# Allegro board PG-ADAPTER-1.brd
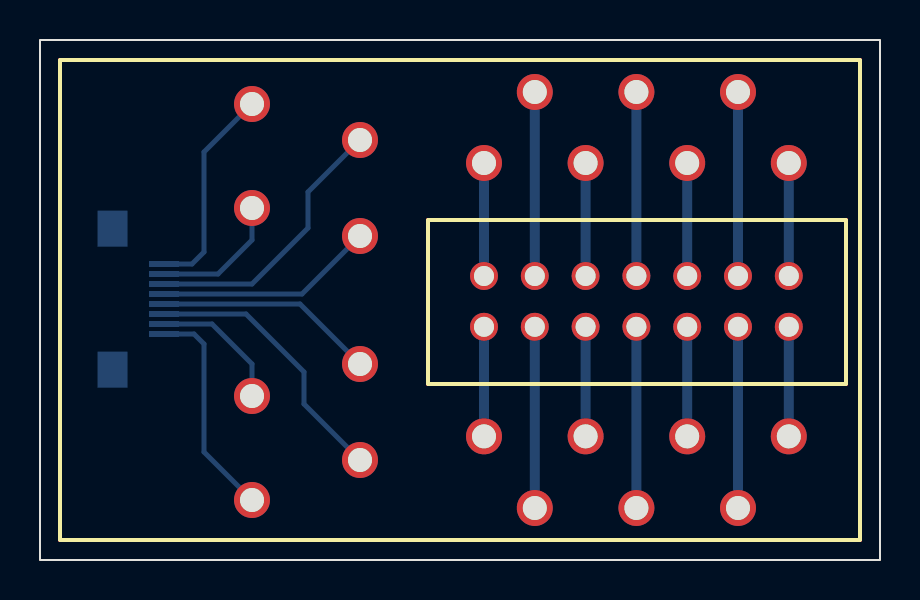
[diagram p0: board, top side]
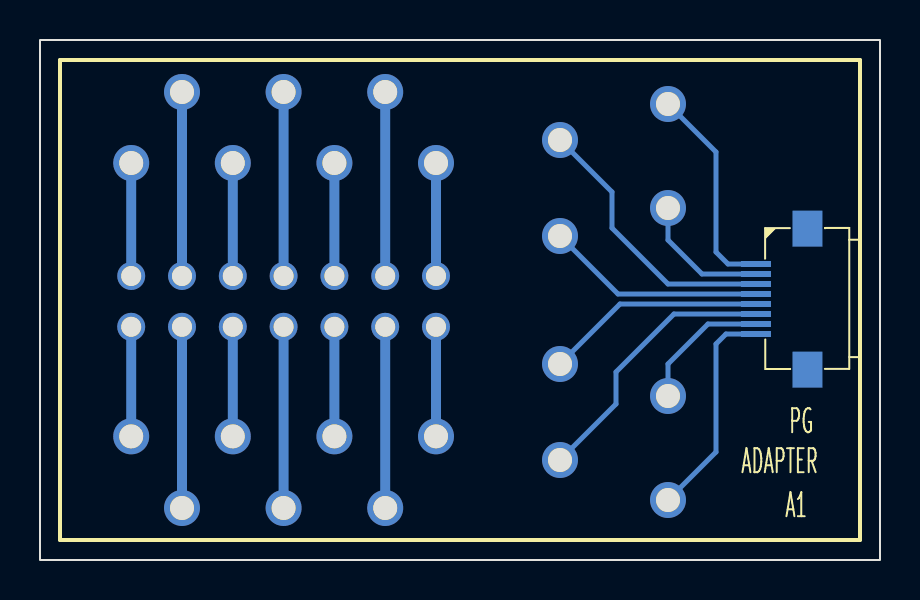
[diagram p1: board, bottom side, seen from below]

Outline 42 x 26 mm; copper layers: TOP, BOTTOM. Coordinates in mm from the lower left corner of the outline.
Outline path: rectangle 0,0 42,26

## Design rules (mm)
constraint set DEFAULT: min track width 0.127

## Placement (name value [footprint] x y rotation side)
J1  CONN-2x7  [CONN-THR-2X7-2D54]  22.2 14.2 0 top
J2  CONN-1X8  [FPC-0D5-8P]  6.2 14.8 270 bottom
NOREF  -  []  0 0 90 top
NOREF#2  -  []  0 26 0 top
TP1  T POINT R  [TP_THR_1D8_1D2]  10.6 22.8 270 bottom
TP2  T POINT R  [TP_THR_1D8_1D2]  10.6 17.6 270 bottom
TP3  T POINT R  [TP_THR_1D8_1D2]  16 21 270 bottom
TP4  T POINT R  [TP_THR_1D8_1D2]  16 16.2 270 bottom
TP5  T POINT R  [TP_THR_1D8_1D2]  16 9.8 270 bottom
TP6  T POINT R  [TP_THR_1D8_1D2]  16 5 270 bottom
TP7  T POINT R  [TP_THR_1D8_1D2]  10.6 8.2 270 bottom
TP8  T POINT R  [TP_THR_1D8_1D2]  10.6 3 270 bottom
TP9  T POINT R  [TP_THR_1D8_1D2]  37.44 19.85 180 bottom
TP10  T POINT R  [TP_THR_1D8_1D2]  34.9 23.4 180 bottom
TP11  T POINT R  [TP_THR_1D8_1D2]  32.36 19.85 180 bottom
TP12  T POINT R  [TP_THR_1D8_1D2]  29.82 23.4 180 bottom
TP13  T POINT R  [TP_THR_1D8_1D2]  27.28 19.85 180 bottom
TP14  T POINT R  [TP_THR_1D8_1D2]  24.74 23.4 180 bottom
TP15  T POINT R  [TP_THR_1D8_1D2]  22.2 19.85 180 bottom
TP16  T POINT R  [TP_THR_1D8_1D2]  37.44 6.18 180 bottom
TP17  T POINT R  [TP_THR_1D8_1D2]  34.9 2.6 180 bottom
TP18  T POINT R  [TP_THR_1D8_1D2]  32.36 6.18 180 bottom
TP19  T POINT R  [TP_THR_1D8_1D2]  29.82 2.6 180 bottom
TP20  T POINT R  [TP_THR_1D8_1D2]  27.28 6.18 180 bottom
TP21  T POINT R  [TP_THR_1D8_1D2]  24.74 2.6 180 bottom
TP22  T POINT R  [TP_THR_1D8_1D2]  22.2 6.18 180 bottom

## Library data of the parts
J1 = CONN-2x7
J2 = CONN-1X8
TP1-TP22 = T POINT R

## Footprints (pads in the part's own frame, mm; a bottom-side part is the same pattern mirrored in y, then rotated)
CONN-THR-2X7-2D54
  round 1.4 hole 1: 1(0,0) 2(0,-2.54) 3(2.54,0) 4(2.54,-2.54) 5(5.08,0) 6(5.08,-2.54) 7(7.62,0) 8(7.62,-2.54) 9(10.16,0) 10(10.16,-2.54) 11(12.7,0) 12(12.7,-2.54) 13(15.24,0) 14(15.24,-2.54)
FPC-0D5-8P
  rect 0.3x1.5 smd: 1(0,0) 2(0.5,0) 3(1,0) 4(1.5,0) 5(2,0) 6(2.5,0) 7(3,0) 8(3.5,0)
  rect 1.8x1.5 smd: 9(-1.767,2.573) 10(5.283,2.573)
TP_THR_1D8_1D2
  round 1.8 hole 1.2: 1(0,0)

## Nets
5V OUT: J1.13 TP9.1(TP)
GND1: J1.1 TP15.1(TP)
GND2: J1.10 TP18.1(TP)
VCC: J1.4 TP21.1(TP)
DONE: J1.12 TP17.1(TP)
I2C.SCL: J1.11 TP10.1(TP)
I2C.SDA: J1.14 TP16.1(TP)
ISPEN/SN: J1.6 TP20.1(TP)
TCK.SCK: J1.9 TP11.1(TP)
TDI.SI: J1.5 TP13.1(TP)
TDO.SO: J1.3 TP14.1(TP)
TMS: J1.7 TP12.1(TP)
TRST: J1.8 TP19.1(TP)
N1212387: J2.1 TP1.1(TP)
N1212399: J2.2 TP2.1(TP)
N1212411: J2.3 TP3.1(TP)
N1212423: J2.4 TP4.1(TP)
N1212433: J2.5 TP5.1(TP)
N1212445: J2.6 TP6.1(TP)
N1212457: J2.7 TP7.1(TP)
N1212474: J2.8 TP8.1(TP)
N1214169: J1.2 TP22.1(TP)

Pads without a net: J2 9 10

## Routing (per net, layer and track width the routed paths; a pad name or vN(x,y) marks a point on that pad's centre or on a via; arc(x,y) is an arc through that point)
5V OUT: length 5.7
  BOTTOM w0.5: J1.13 TP9.1
GND1: length 5.7
  BOTTOM w0.5: J1.1 TP15.1
GND2: length 5.5
  BOTTOM w0.5: J1.10 TP18.1
VCC: length 9.1
  BOTTOM w0.5: J1.4 TP21.1
DONE: length 9.1
  BOTTOM w0.5: J1.12 TP17.1
I2C.SCL: length 9.2
  BOTTOM w0.5: J1.11 TP10.1
I2C.SDA: length 5.5
  BOTTOM w0.5: J1.14 TP16.1
ISPEN/SN: length 5.5
  BOTTOM w0.5: J1.6 TP20.1
TCK.SCK: length 5.7
  BOTTOM w0.5: J1.9 TP11.1
TDI.SI: length 5.7
  BOTTOM w0.5: J1.5 TP13.1
TDO.SO: length 9.2
  BOTTOM w0.5: J1.3 TP14.1
TMS: length 9.2
  BOTTOM w0.5: J1.7 TP12.1
TRST: length 9.1
  BOTTOM w0.5: J1.8 TP19.1
N1212387: length 10.6
  BOTTOM w0.25: TP1.1 8.2,20.4 8.2,15.4 7.6,14.8 J2.1
N1212399: length 6.7
  BOTTOM w0.25: J2.2 8.9,14.3 10.6,16 TP2.1
N1212411: length 13.8
  BOTTOM w0.25: J2.3 10.6,13.8 13.4,16.6 13.4,18.4 TP3.1
N1212423: length 11
  BOTTOM w0.25: TP4.1 13.1,13.3 J2.4
N1212433: length 11
  BOTTOM w0.25: J2.5 13,12.8 TP5.1
N1212445: length 13.8
  BOTTOM w0.25: J2.6 10.3,12.3 13.2,9.4 13.2,7.8 TP6.1
N1212457: length 6.8
  BOTTOM w0.25: J2.7 8.6,11.8 10.6,9.8 TP7.1
N1212474: length 11
  BOTTOM w0.25: TP8.1 8.2,5.4 8.2,10.8 7.7,11.3 J2.8
N1214169: length 5.5
  BOTTOM w0.5: J1.2 TP22.1

## Text on the board
Ref Des/Silkscreen Bottom: PG | A1 | ADAPTER
XSECTION_CHART: *  SURFACE | L1 TOP CONDUCTOR | *  DIELECTRIC | L2 BOTTOM CONDUCTOR | DESIGN CROSS SECTION CHART | ___________________________ | TOTAL THICKNESS 1.535 MM | 1-2
DIMENSION: FIGURE | FINISHED_SIZE | 1.0 | 1.2 | DRILL CHART: TOP to BOTTOM | ALL UNITS ARE IN MILLIMETERS | PLATED | QTY | 14 | 22
